# Altium PCB mchf_pro_ui.PcbDoc (part 6 of 6)
Units mm, origin at the board's own origin, x right, y up, seen from the top; angles counter-clockwise.
Board outline 200.09 x 143.79 mm, 2 copper layers (Top Layer, Bottom Layer); 329 components, 335 nets, 1276 pads, 515 vias.
Unrouted connection lines stored in the file: 91.
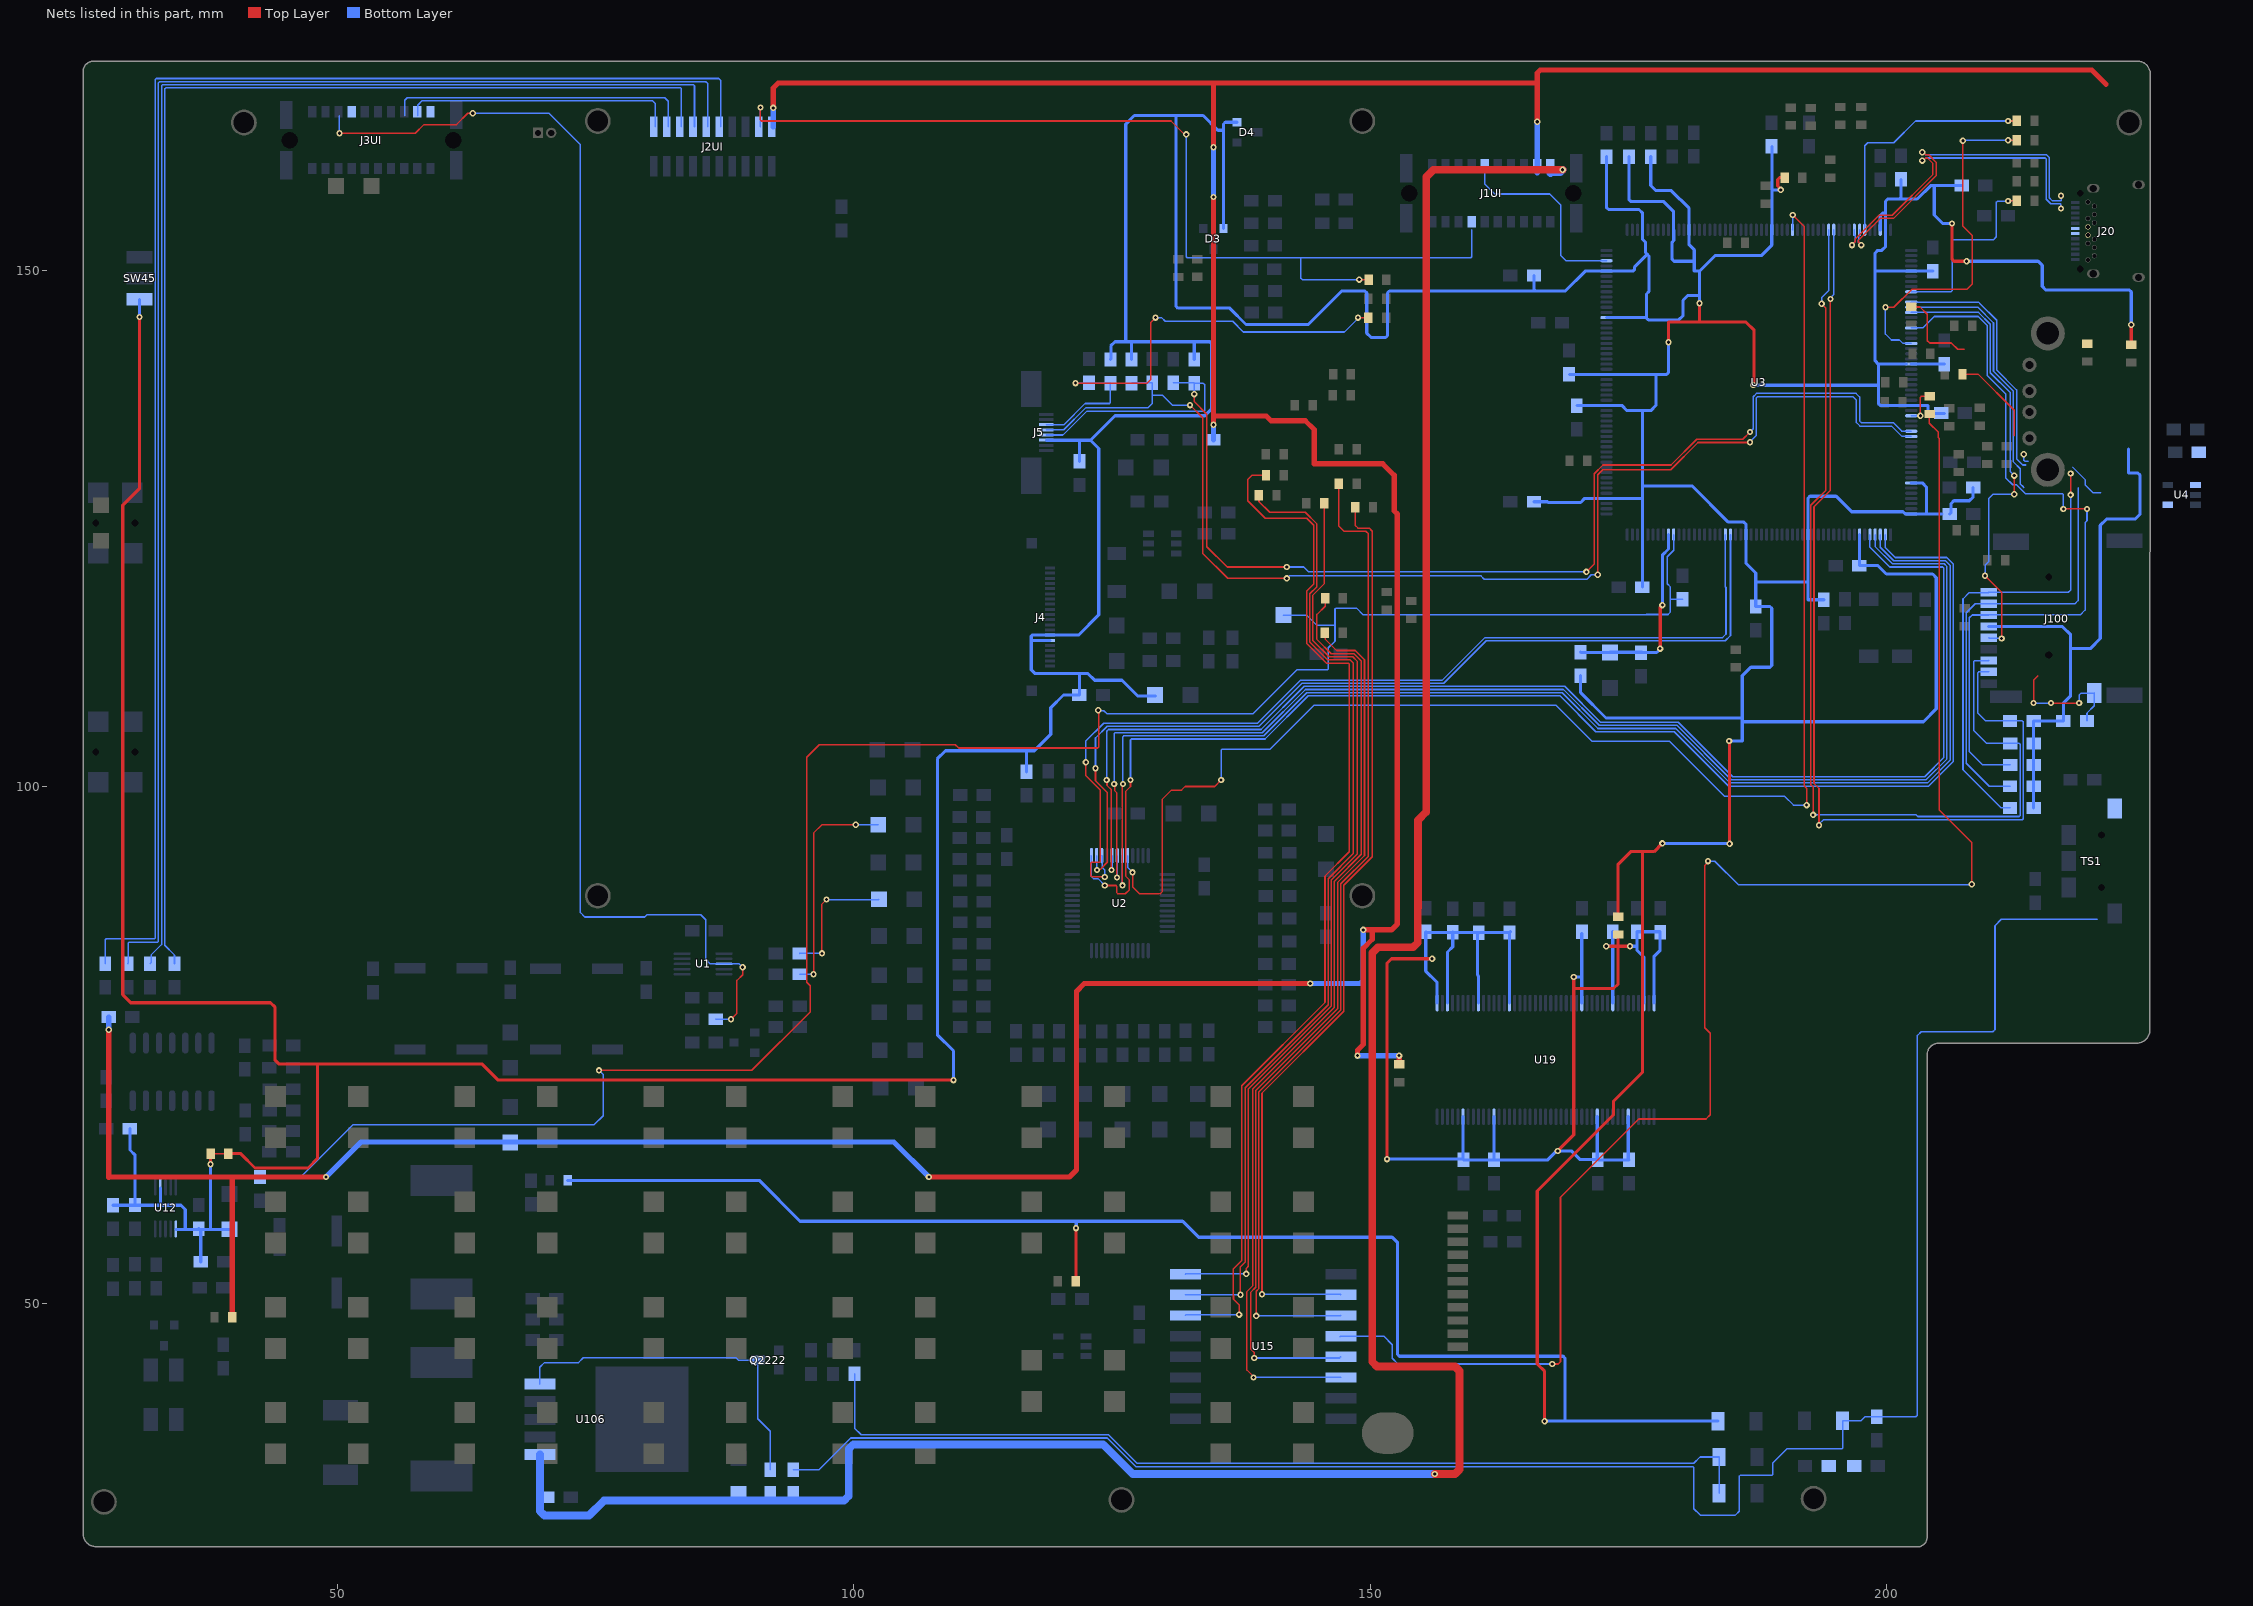
[diagram p5: the nets of this part, all layers, seen from the top]

## Via types
v1: diameter 0.61, hole 0.305, Top Layer to Bottom Layer, 511 vias
v2: diameter 0.762, hole 0.381, Top Layer to Bottom Layer, 4 vias

## Nets (pads, with @x,y where several pads share a name; then routed paths per layer and width w, separated by ;. In a path a pad name is that pad's centre, name@x,y a point inside that pad or via, vN(x,y) a via of type N, cw(c..) or ccw(c..) an arc to the next point about the centre after c; other vN are vias at no path point) (continued)
PTT: J1UI.A17 J2UI.A2 M70.1 | length 95.7
  Top Layer w0.152: v1(90.95,165.75) 90.95,164.539 91.039,164.45 130.7,164.45 132,163.15 v1(132.175,163.15) ; v1(148.916,149.092) M70.1@149.823,149.092
  Bottom Layer w0.152: J2UI.A2@90.92,163.88 90.95,163.91 v1(90.95,165.75) ; v1(132.175,163.15) 132.175,151.309 132.264,151.219 143.25,151.219 ; v1(148.916,149.092) 143.389,149.092 143.25,149.232 143.25,151.219 ; 159.792,153.916 159.792,151.309 159.703,151.219 143.25,151.219
RFM_DIO0: M69.1 U15.14 | length 101.1
  Top Layer w0.152: v1(137.288,48.901) 137.288,49.845 136.744,50.389 136.744,50.715 136.738,50.72 136.738,53.345 137.53,54.137 137.53,71.059 145.598,79.127 145.598,91.352 147.957,93.711 147.957,111.883 147.868,111.972 145.73,111.972 143.824,113.878 143.824,118.943 144.51,119.629 144.51,125.314 143.83,125.994 139.821,125.994 138.125,127.689 138.125,129.735 138.54,130.15 M69.1@139.884,130.15
  Bottom Layer w0.152: U15.14@132.088,48.825 132.164,48.901 v1(137.288,48.901)
RFM_DIO1: M68.1 U15.15 | length 94.9
  Top Layer w0.152: v1(137.411,50.822) 137.411,53.528 137.875,53.992 137.875,70.875 145.903,78.903 145.903,91.107 148.338,93.543 148.338,111.972 148.034,112.277 145.856,112.277 144.129,114.004 144.129,118.683 144.815,119.369 144.815,125.44 143.689,126.566 140.243,126.566 139.211,127.597 139.211,128.175 M68.1@139.186,128.2
  Bottom Layer w0.152: U15.15@132.088,50.825 132.091,50.822 v1(137.411,50.822)
RFM_DIO2: M62.1 U15.16 | length 88.5
  Top Layer w0.152: v1(137.979,52.851) 137.989,52.862 137.989,53.385 138.18,53.575 138.18,70.749 146.207,78.776 146.207,90.981 148.739,93.513 148.739,112.125 148.283,112.581 145.999,112.581 144.434,114.146 144.434,118.557 145.513,119.636 M62.1@145.513,127.425
  Bottom Layer w0.152: U15.16@132.088,52.825 132.114,52.851 v1(137.979,52.851)
RFM_MISO: M63.1 U15.2 | length 89.6
  Top Layer w0.152: v1(139.5,50.88) 139.504,50.884 139.504,70.349 147.427,78.271 147.427,90.476 150.178,93.228 150.178,124.737 149.874,125.042 148.789,125.042 148.535,125.296 M63.1@148.535,127.05
  Bottom Layer w0.152: v1(139.5,50.88) 147.07,50.88 U15.2@147.125,50.825
RFM_MOSI: M64.1 U15.3 | length 95.7
  Top Layer w0.152: v1(138.943,48.781) 138.943,51.174 139.199,51.43 139.199,70.475 147.122,78.398 147.122,90.602 149.805,93.286 149.805,124.483 149.551,124.737 147.449,124.737 146.941,125.245 M64.1@146.941,129.333
  Bottom Layer w0.152: v1(138.943,48.781) 147.081,48.781 U15.3@147.125,48.825
RFM_NSS: M67.1 U15.5 | length 86
  Top Layer w0.152: v1(138.747,44.709) 138.747,45.232 138.393,45.586 138.393,51.055 138.894,51.556 138.894,70.601 146.817,78.524 146.817,90.728 149.425,93.336 149.425,112.301 148.535,113.191 146.72,113.191 145.61,114.301 145.61,114.879 M67.1@145.585,114.904
  Bottom Layer w0.152: v1(138.747,44.709) 147.009,44.709 U15.5@147.125,44.825
RFM_RST: M60.1 U15.6 | length 92.1
  Top Layer w0.152: v1(138.671,42.823) 138.671,42.908 138.039,43.54 138.039,51.133 138.589,51.683 138.589,70.727 146.512,78.65 146.512,90.855 149.12,93.463 149.12,112.175 148.409,112.886 146.194,112.886 144.815,114.266 144.815,116.673 145.618,117.476 M60.1@145.618,118.25
  Bottom Layer w0.152: v1(138.671,42.823) U15.6@147.125,42.825 U15.6@147.125,42.825
RFM_SCK: M72.1 U15.4 | length 155.7
  Top Layer w0.152: v1(167.6,44.125) 168.18,44.125 168.395,44.339 168.395,60.277 175.96,67.842 182.488,67.842 182.903,68.256 182.903,76.13 182.349,76.684 182.349,92.37 182.673,92.694 v1(182.673,92.801) ; M72.1@204.098,136.089 204.098,135.198 204.955,134.341 204.955,133.822 205.044,133.734 205.044,97.771 208.205,94.609 v1(208.205,90.564)
  Bottom Layer w0.152: U15.4@147.05,46.75 U15.4@147.125,46.825 151.275,46.825 152.1,46 152.1,44.691 152.666,44.125 v1(167.6,44.125) ; v1(182.673,92.801) 183.339,92.801 185.63,90.509 208.15,90.509 v1(208.205,90.564)
RX_CLK_N: J2UI.A5 M37.1 | length 149.7
  Bottom Layer w0.152: M37.1@27.528,82.872 27.528,85.189 27.617,85.279 32.284,85.279 32.373,85.368 32.373,168.472 32.462,168.561 86.919,168.561 87.11,168.371 J2UI.A5@87.11,163.88
RX_CLK_P: J2UI.A6 M38.1 | length 145.6
  Bottom Layer w0.152: M38.1@29.696,82.872 29.739,82.915 29.739,84.86 29.828,84.95 32.588,84.95 32.678,85.039 32.678,168.142 32.792,168.256 85.659,168.256 85.84,168.076 J2UI.A6@85.84,163.88
RX_QSD_IN: J2UI.A10 J3UI.A20 | length 26.5
  Bottom Layer w0.152: 57.78,164.95 57.78,165.98 58.195,166.395 80.505,166.395 80.76,166.14 J2UI.A10@80.76,163.88
SAI1_FS_A: U2.43 U3.3 | length 131.2
  Top Layer w0.152: v1(125.992,90.454) 125.992,100.219 v1(126.037,100.264)
  Bottom Layer w0.152: v1(125.992,90.454) U2.43@125.992,93.343 ; v1(126.037,100.264) 126.037,104.845 126.126,104.934 139.668,104.934 143.843,109.109 168.554,109.109 172.021,105.642 179.541,105.642 184.809,100.373 203.912,100.373 206.109,102.57 206.109,119.397 206.109,121.439 205.663,121.885 200.661,121.885 199.349,123.198 U3.3@199.349,124.414
SAI1_FS_B: U2.39 U3.33 | length 93.9
  Top Layer w0.152: v1(122.45,102.375) 122.45,101.089 123.851,99.689 123.851,92.777 123.761,92.687 123.026,92.687 122.936,92.598 122.936,91.399 123.026,91.31 124.236,91.31 v1(124.281,91.265)
  Bottom Layer w0.152: v1(122.45,102.375) 122.45,104.428 124.176,106.153 139.074,106.153 143.249,110.328 156.966,110.328 161.083,114.445 184.076,114.445 184.416,114.785 184.416,119.307 184.349,119.374 U3.33@184.349,124.414 ; U2.39@123.992,93.343 124.027,93.308 124.027,92.191 124.281,91.937 v1(124.281,91.265)
SAI1_MCLK_A: U2.44 U3.137 | length 146.4
  Top Layer w0.152: v1(126.974,91.717) 126.974,90.324 127.649,89.649 129.649,89.649 129.825,89.825 129.825,98.768 130.74,99.683 131.716,99.683 132.057,100.024 134.92,100.024 v1(135.542,100.647) ; v1(190.883,155.355) 192,154.238 192,100.066 192.225,99.841 v1(192.225,98.225)
  Bottom Layer w0.152: U2.44@126.492,93.343 126.492,92.198 v1(126.974,91.717) ; v1(135.542,100.647) 135.542,103.563 135.632,103.653 140.299,103.653 144.536,107.89 167.957,107.89 171.425,104.422 178.933,104.422 184.271,99.084 190.082,99.084 190.941,98.225 v1(192.225,98.225) ; U3.137@190.849,153.914 190.866,153.931 190.866,155.339 v1(190.883,155.355)
SAI1_SCK_A: U2.42 U3.4 | length 130.6
  Top Layer w0.152: v1(125.184,100.276) 125.23,100.231 125.23,99.637 125.459,99.409 v1(125.459,91.216)
  Bottom Layer w0.152: v1(125.184,100.276) 125.184,105.149 125.273,105.239 139.537,105.239 143.712,109.414 168.68,109.414 172.147,105.946 179.667,105.946 184.935,100.678 203.785,100.678 205.804,102.697 205.804,119.523 205.804,121.313 205.536,121.581 200.535,121.581 198.849,123.267 U3.4@198.849,124.414 ; v1(125.459,91.216) 125.492,91.249 U2.42@125.492,93.343
SAI1_SCK_B: U2.38 U3.32 | length 90.6
  Top Layer w0.152: v1(123.381,101.8) 123.381,100.589 124.526,99.445 124.526,92.687 123.865,92.026 123.613,92.026 v1(123.525,91.938)
  Bottom Layer w0.152: v1(123.381,101.8) 123.381,104.718 124.511,105.848 139.2,105.848 143.375,110.023 157.092,110.023 161.209,114.14 184.349,114.14 184.849,114.64 U3.32@184.849,124.414 ; U2.38@123.492,93.343 123.492,91.972 v1(123.525,91.938)
SAI1_SD_A: U2.41 U3.5 | length 129.8
  Top Layer w0.152: v1(124.462,100.664) 124.496,100.629 124.496,100.131 124.925,99.702 v1(124.925,91.938)
  Bottom Layer w0.152: v1(124.462,100.664) 124.462,105.368 124.637,105.544 139.41,105.544 143.585,109.719 168.806,109.719 172.273,106.251 179.793,106.251 185.062,100.983 203.659,100.983 205.499,102.823 205.499,119.65 205.499,121.187 205.41,121.276 200.266,121.276 198.349,123.192 U3.5@198.349,124.414 ; v1(124.925,91.938) 124.992,92.005 U2.41@124.992,93.343
SAI1_SD_B: U2.37 U3.2 | length 135.5
  Top Layer w0.152: v1(124.281,90.447) 125.369,90.447 125.459,90.357 125.459,89.728 125.548,89.639 126.267,89.639 126.669,90.04 126.669,90.98 126.297,91.352 126.297,99.547 126.774,100.024 v1(126.774,100.651)
  Bottom Layer w0.152: U2.37@122.992,93.343 122.961,93.312 122.961,91.329 123.178,91.111 123.617,91.111 v1(124.281,90.447) ; v1(126.774,100.651) 126.774,104.533 126.863,104.623 139.788,104.623 143.969,108.804 168.352,108.804 171.819,105.337 179.402,105.337 184.689,100.05 204.02,100.05 206.414,102.444 206.414,119.271 206.414,121.565 205.789,122.19 200.788,122.19 199.849,123.129 U3.2@199.849,124.414
SD_DET: J100.10 M85.1 R39.2 | length 20.8
  Top Layer w0.152: M85.1@202.354,146.466 202.38,146.44 203.19,146.44 203.9,145.731 203.9,143.187 204.132,142.955 206.23,142.955 206.842,142.343 207.464,142.343 ; v1(214.191,108.1) 214.191,110.317 214.595,110.721 ; v1(215.875,108.1) v1(218.6,108.1)
  Bottom Layer w0.152: v1(214.191,108.1) v1(215.875,108.1) ; v1(218.6,108.1) 218.6,108.889 218.783,109.072 220.047,109.072 J100.10@220.05,109.075 ; R39.2@219.361,106.375 219.361,107.132 220.061,107.832 J100.10@220.061,109.072
SD_POWER: C43.1 J100.4 R36.1 R37.1 R38.1 R39.1 R40.1 R41.1 U4.1 | length 54
  Bottom Layer w0.305: J100.4@209.85,115.525 209.857,115.518 216.982,115.518 217.775,114.725 217.775,113.37 ; R36.1@214.191,97.95 214.191,98.606 R41.1@214.191,100.048 214.191,102.119 214.191,104.2 R37.1@214.191,106.375 R39.1@217.075,106.375 217.075,108.1 217.775,108.8 217.775,113.37 ; 223.385,132.675 223.385,130.364 224.296,130.364 224.475,130.186 224.475,126.353 224.037,125.914 221.263,125.914 220.65,125.302 220.65,114.35 219.67,113.37 217.775,113.37
SD_PWR_CNTR: M3.1 U4.4 | length 13.9
  Top Layer w0.152: M3.1@207.305,139.948 208.814,139.948 212.325,136.437 212.325,133.982
  Bottom Layer w0.152: v1(213.239,132.185) 213.236,132.181 213.236,131.613 213.325,131.524 213.651,131.524 ; 218,130.914 219.175,129.739 219.175,129.236 219.946,128.464 220.685,128.464
SDMMC1_CK: J100.5 U3.169 | length 43.8
  Top Layer w0.152: v1(209.495,120.425) 211.094,118.826 v1(211.094,114.362) ; v1(212.325,128.315) v1(212.325,130.119)
  Bottom Layer w0.152: U3.169@202.349,145.914 208.867,145.914 210.006,144.775 210.006,140.088 211.935,138.159 211.935,130.508 v1(212.325,130.119) ; v1(209.495,120.425) 209.495,121.449 209.85,121.804 209.85,127.907 210.258,128.315 v1(212.325,128.315) ; J100.5@209.85,114.425 209.913,114.362 v1(211.094,114.362)
SDMMC1_CMD: J100.3 R40.2 U3.172 | length 72.4
  Top Layer w0.152: v1@217.083,126.906 v1(217.075,126.898) v1(219.361,126.898)
  Bottom Layer w0.152: U3.172@202.349,144.414 203.47,144.414 204.577,145.522 208.828,145.522 209.701,144.649 209.701,139.814 211.5,138.015 211.5,129.898 212.162,129.236 212.545,129.236 213.432,128.349 216.986,128.349 217.075,128.26 v1(217.075,126.898) ; R40.2@211.938,102.119 209.264,102.119 207.967,103.416 207.967,116.351 208.245,116.629 209.846,116.629 J100.3@209.85,116.625 209.862,116.637 218.7,116.637 219.175,117.112 219.175,125.565 219.361,125.751 v1(219.361,126.898)
SDMMC1_D0: J100.7 R38.2 U3.144 | length 98
  Top Layer w0.152: v1(192.848,97.28) 192.848,99.978 192.631,100.195 192.631,127.24 194.08,128.69 194.08,146.355 v1(193.672,146.764)
  Bottom Layer w0.152: v1(192.848,97.28) 202.806,97.28 202.965,97.121 212.799,97.121 212.888,97.21 212.888,104.111 212.799,104.2 R38.2@211.938,104.2 209.65,104.2 208.417,105.433 208.417,112.126 208.506,112.215 209.84,112.215 J100.7@209.85,112.225 ; v1(193.672,146.764) 193.672,147.348 194.349,148.026 U3.144@194.349,153.914
SDMMC1_D1: J100.8 R37.2 U3.145 | length 97.8
  Top Layer w0.152: v1(193.418,96.283) 193.418,99.839 192.936,100.321 192.936,127.114 194.523,128.701 v1(194.523,147.222)
  Bottom Layer w0.152: v1(193.418,96.283) 193.418,96.386 193.848,96.816 213.103,96.816 213.193,96.906 213.193,106.283 213.101,106.375 R37.2@211.905,106.375 209.55,106.375 208.8,107.125 208.8,111.04 208.889,111.129 209.846,111.129 J100.8@209.85,111.125 ; v1(194.523,147.222) 194.523,147.323 194.849,147.65 U3.145@194.849,153.914
SDMMC1_D2: J100.1 R36.2 U3.167 | length 68.8
  Top Layer w0.152: v1(217.775,128.26) v1@217.775,130.119
  Bottom Layer w0.152: U3.167@202.349,146.914 208.849,146.914 209,146.764 ; 209.001,146.764 210.616,145.149 210.616,140.34 212.545,138.411 212.545,131.751 213.146,131.15 213.432,131.15 ; 209.902,99.1 211.052,97.95 R36.2@211.905,97.95 ; 209.902,99.1 207.358,101.644 207.358,118.183 207.973,118.798 209.823,118.798 209.858,118.833 217.557,118.833 217.775,119.051 v1(217.775,128.26)
  other v1: 217.775,130.321
SDMMC1_D3: J100.2 R41.2 U3.168 | length 67.7
  Bottom Layer w0.152: U3.168@202.349,146.414 208.798,146.414 210.311,144.902 210.311,140.214 212.24,138.285 212.24,131.446 212.9,130.786 212.9,129.312 213.181,129.031 213.256,128.956 ; J100.2@209.85,117.725 209.842,117.717 208.537,117.717 207.662,116.843 207.662,102.288 209.902,100.048 R41.2@211.905,100.048 ; J100.2@209.85,117.725 218.201,117.724 218.5,118.023 218.5,128.555 218.5,128.956
SPA_L: C8.2 R1.2 | length 12.7
  Top Layer w0.152: v1(96.9,83.875) 96.9,88.642 v1(97.34,89.082)
  Bottom Layer w0.152: R1.2@94.736,83.85 94.761,83.875 v1(96.9,83.875) ; v1(97.34,89.082) 102.386,89.082 C8.2@102.42,89.117
SPA_R: C9.2 R2.2 | length 21.6
  Top Layer w0.152: v1(96.095,81.85) 96.095,95.525 96.9,96.33 v1(100.182,96.33)
  Bottom Layer w0.152: R2.2@94.736,81.85 v1(96.095,81.85) ; v1(100.182,96.33) C9.2@102.345,96.33
SPK_RET: J3UI.A14 R3.2 U1.3 | length 128.7
  Top Layer w0.152: v1(50.199,163.258) 57.544,163.258 58.388,164.102 61.527,164.102 62.625,165.2 v1(63.1,165.2) ; v1(88.1,77.5) 88.673,78.073 88.673,81.253 89.225,81.805 v1(89.225,82.525)
  Bottom Layer w0.152: 50.16,164.95 50.16,163.297 v1(50.199,163.258) ; v1(63.1,165.2) 70.484,165.2 73.526,162.158 73.526,149.575 73.526,87.825 73.955,87.396 79.759,87.396 79.975,87.612 85.175,87.612 85.655,87.132 85.655,83.295 86.1,82.85 U1.3@87.425,82.85 88.893,82.85 89.218,82.525 v1(89.225,82.525) ; R3.2@86.625,77.5 v1(88.1,77.5)
SWCLK: M1c.2 U3.165 | length 18.7
  Top Layer w0.152: v1(211.725,156.707) M1c.2@212.563,156.707
  Bottom Layer w0.152: U3.165@202.349,147.914 206.188,147.914 206.3,148.026 206.3,152.87 206.389,152.96 210.311,152.96 210.585,153.234 210.585,156.576 210.674,156.666 211.683,156.666 v1(211.725,156.707)
SWDIO: M1b.2 U3.151 | length 23.8
  Top Layer w0.152: v1(211.725,164.45) M1b.2@212.563,164.45
  Bottom Layer w0.152: U3.151@197.849,153.914 197.849,162.061 198.125,162.337 200.651,162.337 202.764,164.45 v1(211.725,164.45)
SWO: M72.2 U3.189 | length 3.6
  Top Layer w0.152: v1(203.233,135.914) 203.233,137.714 203.322,137.803 M72.2@204.153,137.803
  Bottom Layer w0.152: U3.189@202.349,135.914 v1(203.233,135.914)
TOUCH_INT: C62.1 J5.6 M5.1 R55.2 | length 47.8
  Top Layer w0.152: v1(121.445,139.07) 128.378,139.07 128.75,139.442 128.75,144.964 v1(129.2,145.414) ; v1(148.789,145.414) M5.1@149.797,145.414
  Bottom Layer w0.152: J5.6@118.628,135.05 120.328,135.05 122.378,137.1 124.736,137.1 124.825,137.189 R55.2@124.825,139.075 122.8,139.075 C62.1@122.75,139.125 122.695,139.07 v1(121.445,139.07) ; v1(129.2,145.414) 129.784,145.414 130.141,145.057 136.663,145.057 137.697,144.024 147.481,144.024 148.789,145.332 v1(148.789,145.414)
TOUCH_SCK: C63.2 J5.4 R53.2 U3.192 | length 124.4
  Top Layer w0.152: v1(132.941,138.008) 132.941,137.283 134.16,136.064 134.16,123.24 136.125,121.275 v1(141.9,121.275) ; v1(170.9,120.8) 171.663,121.563 171.663,130.31 172.503,131.15 179.097,131.15 181.577,133.63 186.029,133.63 v1(186.747,134.348)
  Bottom Layer w0.152: J5.4@118.628,134.05 120.232,134.05 122.552,136.37 133.867,136.37 133.956,136.459 133.956,138.914 133.795,139.075 R53.2@132.936,139.075 ; C63.2@130.9,139.092 132.919,139.092 R53.2@132.936,139.075 ; v1(132.941,138.008) 132.941,139.07 R53.2@132.936,139.075 ; v1(141.9,121.275) 143.543,121.275 144.018,120.8 v1(170.9,120.8) ; v1(186.747,134.348) 187.044,134.645 187.044,137.751 187.368,138.075 197.009,138.075 197.349,137.735 197.349,135.414 197.513,135.25 200.597,135.25 201.348,134.5 201.433,134.414 U3.192@202.349,134.414
TOUCH_SDA: C61.2 J5.5 R54.2 U3.193 | length 122.1
  Top Layer w0.152: v1(132.525,136.945) 133.758,135.712 133.758,122.592 136.175,120.175 v1(141.9,120.175) ; v1(171.996,120.526) 171.996,130.212 172.483,130.699 179.078,130.699 181.703,133.325 186.718,133.325 v1(186.747,133.354)
  Bottom Layer w0.152: J5.5@118.628,134.55 120.301,134.55 122.426,136.675 128.45,136.675 128.875,137.1 128.875,137.914 ; R54.2@126.872,139.075 126.922,139.125 C61.2@128.875,139.125 128.875,137.914 ; v1(132.525,136.945) 130.811,136.945 129.842,137.914 128.875,137.914 ; v1(141.9,120.175) 142.133,120.408 160.707,120.408 161.016,120.099 170.953,120.099 171.38,120.526 v1(171.996,120.526) ; v1(186.747,133.354) 186.747,133.406 187.349,134.008 187.349,137.625 187.494,137.77 196.685,137.77 197.044,137.411 197.044,135.25 197.38,134.914 200.444,134.914 201.444,133.914 U3.193@202.349,133.914
TX_CLK_N: J2UI.A8 M40.1 | length 138.8
  Bottom Layer w0.152: M40.1@34.234,82.872 34.23,82.876 34.23,83.71 33.29,84.65 33.29,167.558 33.379,167.647 83.211,167.647 83.3,167.558 J2UI.A8@83.3,163.88
TX_CLK_P: J2UI.A7 M39.1 | length 141.1
  Bottom Layer w0.152: M39.1@31.863,82.872 31.967,82.975 31.967,83.71 32.983,84.726 32.983,167.862 33.072,167.952 84.481,167.952 84.57,167.862 J2UI.A7@84.57,163.88
TX_MIX: J2UI.A9 J3UI.A19 | length 29.7
  Bottom Layer w0.152: 56.51,164.95 56.51,166.45 56.76,166.7 81.691,166.7 82.03,166.361 J2UI.A9@82.03,163.88
UI_3V_LO: C65.1 C66.1 M34.2 M36.2 R59.2 R60.2 RFC6.2 U12.1 U12.7 | length 33.9
  Top Layer w0.305: v1(37.724,63.464) M34.2@37.724,64.485
  Bottom Layer w0.305: R60.2@28.292,59.491 30.418,59.491 32.861,59.491 34.864,59.491 35.273,59.082 35.273,57.217 35.214,57.158 ; M36.2@29.914,66.892 29.918,66.889 29.918,64.835 30.418,64.335 R59.2@30.418,59.518 ; 32.861,59.55 U12.7@32.861,61.156 ; U12.1@34.388,57.158 35.214,57.158 ; RFC6.2@36.774,54.014 C65.1@36.774,57.031 ; v1(37.724,63.464) 37.724,57.158 ; C66.1@39.55,57.158 37.724,57.158 ; 35.214,57.158 36.578,57.158 C65.1@36.578,57.227 36.647,57.158 36.774,57.158 37.724,57.158
UI_3V_MCU: C59.2 C60.1 C64.2 Cp7.1 Cp17.1 Cp29.1 Cp49.1 Cp56.1 Cp74.1 Cp80.1 Cp100.1 Cp108.1 Cp114.1 Cp117.1 Cp133.1 Cp155.1 Cp161.1 Cp179.1 Cp187.1 Cp208.1 D3.2 D4.2 D17.1 J4.6 J4.7 J5.3 M1.2 M22.1 M25.1 M34.1 M42.1 M43.1 M120.2 R32.1 R33.1 R53.1 R54.1 R55.1 RFC3.1 SW45.3 U3.7 U3.17 U3.29 U3.49 U3.56 U3.74 U3.80 U3.91 U3.100 U3.108 U3.114 U3.117 U3.133 U3.154 U3.155 U3.161 U3.179 U3.187 U3.202 U3.208 | length 1042.9
  Top Layer w0.305: v1(30.85,145.475) 30.85,128.885 29.219,127.254 29.219,79.881 30,79.1 43.525,79.1 43.975,78.65 43.975,73.525 44.325,73.175 47.975,73.175 ; M34.1@39.439,64.485 40.64,64.485 42.025,63.1 47.15,63.1 48.075,64.025 48.075,73.075 47.975,73.175 ; v1(109.643,71.601) 65.553,71.601 63.979,73.175 47.975,73.175 ; M42.1@121.457,52.125 121.5,52.168 v1(121.5,57.275) ; v1(166.862,38.582) 166.862,43.409 166.15,44.12 166.15,60.875 173.53,68.255 173.53,69.565 176.327,72.362 176.327,93.725 ; M43.1@173.974,87.41 173.974,92.503 175.196,93.725 176.327,93.725 ; v1(178.257,94.524) 177.458,93.725 176.327,93.725 ; v1(178.849,143.035) 178.849,144.975 181.849,144.975 ; v1(181.849,146.806) 181.849,144.975 ; v1(184.72,104.422) 184.769,104.373 v1(184.769,94.491) ; v1@187.135,139.168 187.135,144.19 186.351,144.975 181.849,144.975 ; v1(189.711,157.783) 189.711,157.866 189.421,158.156 189.421,158.786 189.6,158.965 M22.1@190.095,158.965 ; v1(206.3,154.524) 206.3,151.051 206.478,150.873 v1(207.706,150.873) ; M25.1@223.62,142.782 223.65,142.812 v1(223.65,144.731)
  Bottom Layer w0.305: v1(30.85,145.475) SW45.3@30.85,147.175 ; M120.2@72.282,61.898 90.832,61.898 94.78,57.95 121.525,57.95 ; v1(109.643,71.601) 109.643,74.432 108.075,76 108.075,102.696 108.869,103.49 116.882,103.49 ; M1.2@116.704,101.45 116.704,103.312 116.882,103.49 ; J5.3@118.628,133.55 121.825,133.55 ; J4.6@118.975,114.175 117.24,114.175 117.165,114.1 ; v1(121.5,57.275) 121.525,57.3 121.525,57.95 ; C64.2@121.825,131.5 121.825,133.55 ; R55.1@124.825,141.361 124.875,141.411 124.875,142.675 125.275,143.075 126.307,143.075 ; R54.1@126.872,141.361 126.872,143.025 126.922,143.075 ; C60.1@129.161,108.788 127.45,108.788 127.45,108.817 125.952,110.315 123.297,110.315 122.661,110.95 121.825,110.95 ; R53.1@132.936,141.361 132.936,143.07 132.941,143.075 ; D3.2@135.78,154.034 135.78,163.55 ; D4.2@137.075,164.33 135.959,164.33 135.78,164.151 135.78,163.55 ; Cp56.1@165.828,127.584 167.136,127.584 167.199,127.522 170.343,127.522 170.736,127.914 176.349,127.914 ; Cp100.1@165.828,149.487 165.828,148.164 166.007,147.985 ; v1(166.862,38.582) 166.88,38.6 168.827,38.6 ; Cp80.1@169.259,139.914 177.635,139.914 ; Cp74.1@169.984,136.914 174.332,136.914 174.832,136.414 176.259,136.414 ; RFC3.1@170.343,110.743 170.343,109.11 172.8,106.653 185.991,106.653 ; U3.91@172.849,145.414 176.679,145.414 176.723,145.37 ; Cp108.1@172.849,160.99 172.858,160.981 172.858,156.054 173.036,155.875 175.989,155.875 176.349,155.515 U3.108@176.349,153.914 176.349,152.978 176.622,152.705 176.622,151.708 176.787,151.543 ; Cp114.1@175.019,160.99 175.019,156.844 175.198,156.666 178.343,156.666 179.349,155.659 U3.114@179.349,153.914 179.352,153.912 179.352,152.874 179.202,152.725 179.202,151.055 179.38,150.876 181.349,150.876 ; Cp49.1@176.349,119.335 176.349,127.914 ; Cp117.1@177.135,160.99 177.135,158.209 177.635,157.709 179.129,157.709 180.849,155.989 U3.117@180.849,153.914 180.849,152.471 181.349,151.971 181.349,150.876 ; v1(178.257,94.524) 178.274,94.507 184.753,94.507 v1(184.769,94.491) ; v1@178.849,142.914 178.849,140.093 178.671,139.914 177.635,139.914 ; v1(181.849,146.806) 181.849,147.568 ; D17.1@183.65,38.6 168.827,38.6 ; v1(184.72,104.422) 185.991,104.422 185.991,106.293 ; v1@187.066,138.863 199.171,138.863 ; 188.859,159.446 188.859,157.783 ; 188.864,159.506 Cp133.1@188.864,161.98 ; v1(189.711,157.783) 188.859,157.783 ; Cp17.1@193.873,118.108 192.349,118.108 192.349,119.836 ; U3.7@197.349,124.414 197.349,121.425 Cp7.1@197.327,121.403 199.133,121.403 199.939,120.597 204.419,120.597 204.775,120.241 204.775,107.537 203.532,106.293 185.991,106.293 ; U3.154@199.349,153.914 199.349,155.275 199.589,155.515 199.849,155.515 ; Cp155.1@201.362,158.793 201.362,157.07 201.183,156.891 ; U3.179@201.902,140.912 199.171,140.912 ; U3.202@202.349,129.414 203.416,129.414 203.823,129.007 203.823,126.414 ; U3.179@202.349,140.914 Cp179.1@205.536,140.914 ; Cp161.1@204.422,149.917 202.351,149.917 U3.161@202.349,149.914 202.345,149.918 198.857,149.918 198.853,149.914 ; 205.298,126.414 203.823,126.414 ; Cp187.1@205.536,136.128 204.241,136.128 203.955,136.414 203.955,136.914 199.349,136.914 199.171,137.093 199.171,138.863 ; Cp208.1@206.071,126.409 206.21,126.549 206.21,127.42 206.471,127.68 207.963,127.68 208.335,128.052 R33.1@208.335,128.956 ; v1(206.3,154.524) 205.398,154.524 204.577,155.345 204.577,158.195 ; R32.1@207.223,158.195 204.577,158.195 ; v1(207.706,150.873) 214.627,150.873 215.025,150.475 215.025,148.45 215.396,148.079 223.471,148.079 223.65,147.9 v1(223.65,144.731) ; 116.882,103.49 117.453,103.49 119.049,105.087 119.049,107.651 120.285,108.887 C59.2@121.825,108.887 121.825,110.95 ; 117.165,114.1 117.165,114.586 117.254,114.675 J4.7@118.975,114.675 121.732,114.675 123.705,116.647 123.705,132.745 122.9,133.55 ; 117.165,114.1 117.165,111.335 117.55,110.95 121.825,110.95 ; 121.525,57.95 131.813,57.95 133.363,56.4 152.1,56.4 152.625,55.875 152.625,45.048 152.804,44.869 168.648,44.869 168.827,44.691 168.827,38.6 ; 121.825,133.55 122.9,133.55 ; 122.9,133.55 125.271,135.921 133.956,135.921 134.625,136.59 134.625,142.896 134.446,143.075 132.941,143.075 ; 126.307,143.075 126.307,164.132 127.15,164.975 131.125,164.975 ; 126.307,143.075 126.922,143.075 ; 126.922,143.075 132.941,143.075 ; 131.125,164.975 133.801,164.975 135.226,163.55 135.78,163.55 ; 131.125,164.975 131.175,164.925 131.175,146.515 131.354,146.336 136.374,146.336 137.957,144.753 143.993,144.753 147.225,147.985 149.456,147.985 149.635,147.807 149.635,143.914 150.061,143.488 151.471,143.488 151.65,143.666 151.65,147.807 151.829,147.985 166.007,147.985 ; 166.007,147.985 168.85,147.985 170.78,149.914 U3.100@172.849,149.914 175.394,149.915 175.573,150.093 175.573,150.329 176.787,151.543 ; 176.259,136.414 176.349,136.324 176.349,129.114 ; 176.259,136.414 177.135,136.414 177.635,136.914 177.635,139.914 ; 176.349,127.914 176.349,129.114 ; 176.349,129.114 181.15,129.114 184.641,125.623 186.144,125.623 186.349,125.418 U3.29@186.349,124.414 186.351,124.413 186.351,121.639 187.298,120.692 187.298,119.736 ; 176.723,145.37 176.902,145.192 179.849,145.192 180.254,145.596 180.254,147.084 180.738,147.568 181.849,147.568 ; 176.723,145.37 176.723,147.701 176.951,147.929 176.951,151.378 176.787,151.543 ; 181.349,150.876 181.349,149.914 181.849,149.914 ; 181.849,147.568 181.849,149.914 ; 181.849,149.914 183.349,151.415 187.835,151.415 188.849,152.429 U3.133@188.849,153.914 188.849,154.36 188.859,154.369 188.859,157.783 ; 185.991,106.293 185.991,106.653 ; 185.991,106.653 185.991,110.743 186.824,111.577 188.671,111.577 188.849,111.755 188.849,117.274 188.671,117.452 Cp29.1@187.292,117.452 187.292,119.197 187.298,119.203 187.298,119.736 ; 187.298,119.736 187.398,119.836 192.349,119.836 ; 192.349,119.836 192.349,127.938 192.537,128.125 195.074,128.125 196.582,126.617 201.553,126.617 201.756,126.414 U3.208@202.349,126.414 203.823,126.414 ; 198.853,149.914 198.853,151.674 199.102,151.923 199.51,151.923 199.849,152.262 199.849,155.515 ; 198.853,149.914 198.853,141.23 199.171,140.912 ; 199.171,138.863 199.171,140.912 ; 199.849,155.515 199.849,156.666 200.075,156.891 201.183,156.891 ; 201.183,156.891 202.915,156.891 204.219,158.195 204.577,158.195
  other v1: 187.066,138.883
UI_3V_SDRAM: Cr1.1 Cr3.1 Cr9.1 Cr15.1 Cr29.1 Cr35.1 Cr41.1 Cr43.1 Cr49.1 Cr55.1 Cr75.1 Cr81.1 M43.2 U19.1 U19.3 U19.9 U19.15 U19.29 U19.35 U19.41 U19.43 U19.49 U19.55 U19.75 U19.81 | length 162.8
  Top Layer w0.305: v1(151.602,63.957) 151.602,82.924 152.03,83.353 v1(155.969,83.353) ; v1(168.127,64.75) 168.127,64.771 169.674,66.318 169.674,80.525 ; v1(169.674,81.584) 169.674,80.525 ; v1(172.818,84.57) 172.82,84.568 173.974,84.568 ; M43.2@173.974,85.696 173.974,84.568 ; v1(175.129,84.568) 173.974,84.568 ; 169.674,80.525 169.729,80.47 173.53,80.47 173.974,80.914 173.974,84.568
  Bottom Layer w0.305: v1(151.602,63.957) 158.949,63.957 Cr81.1@159.02,63.887 158.956,63.95 U19.81@158.956,68.06 ; v1(155.969,83.353) 155.354,83.353 ; U19.1@156.456,79.06 156.456,81.053 155.354,82.155 155.354,83.353 ; U19.3@157.456,79.06 157.456,84.005 157.962,84.511 Cr3.1@157.962,85.894 ; Cr3.1@157.962,85.915 Cr3.1@157.962,85.894 ; Cr81.1@159.025,63.887 Cr75.1@161.951,63.887 167.154,63.887 168.017,64.75 v1(168.127,64.75) 169.451,64.75 170.292,63.909 Cr55.1@172.012,63.909 ; U19.9@160.456,79.06 160.456,81.69 160.376,81.77 160.376,85.757 Cr9.1@160.49,85.872 ; Cr75.1@161.956,63.909 U19.75@161.956,68.06 ; U19.15@163.456,79.06 163.456,85.888 Cr15.1@163.462,85.894 ; Cr15.1@163.542,85.973 Cr15.1@163.462,85.894 ; v1(169.674,81.584) 170.342,81.584 170.456,81.469 ; U19.29@170.456,79.06 170.456,81.469 ; Cr29.1@170.456,85.81 170.456,81.469 ; U19.55@171.956,68.06 171.956,63.964 Cr55.1@172.012,63.909 ; v1(172.818,84.57) 173.456,84.57 ; U19.35@173.456,79.06 173.456,84.57 ; Cr35.1@173.456,85.973 173.456,84.57 ; Cr49.1@174.956,63.952 U19.49@174.956,68.06 ; Cr49.1@175.021,63.887 172.034,63.887 Cr55.1@172.012,63.909 ; v1(175.129,84.568) 175.799,84.568 175.801,84.57 ; U19.41@176.456,79.06 176.456,83.525 175.801,84.18 175.801,84.57 ; U19.43@177.456,79.06 177.456,83.6 178.036,84.18 178.036,85.973 Cr41.1@175.807,85.973 175.801,85.973 175.801,84.57 ; 155.354,83.353 Cr1.1@155.354,85.952 155.412,85.894 Cr3.1@157.962,85.894 ; Cr3.1@157.962,85.894 Cr15.1@163.462,85.894
USART2_TX: M1a.2 U3.175 | length 34.3
  Top Layer w0.152: v1(199.849,146.414) 200.656,146.414 202.412,148.17 207.754,148.17 208.239,148.655 208.239,153.398 207.345,154.292 v1(207.345,162.541) ; v1(211.725,162.58) M1a.2@212.563,162.58
  Bottom Layer w0.152: v1(199.849,146.414) 199.849,143.831 200.43,143.25 201.202,143.25 201.538,142.914 U3.175@202.349,142.914 ; v1(207.345,162.541) 207.384,162.58 v1(211.725,162.58)
USB_DFU_N: J20.A7 J20.B7 U3.149 | length 33
  Top Layer w0.152: v1(196.614,152.431) 196.614,152.451 196.911,152.749 196.911,153.012 199.219,155.32 200.501,155.32 204.446,159.265 204.446,160.336 203.917,160.866 203.735,160.866 203.481,160.611 v1(203.417,160.611)
  Bottom Layer w0.152: v1(196.614,152.431) 196.614,152.451 196.911,152.749 196.911,153.051 196.947,153.086 196.947,153.327 196.849,153.424 U3.149@196.849,153.914 ; v1(203.417,160.611) 203.481,160.611 203.735,160.866 215.321,160.866 215.411,160.776 215.411,156.882 215.85,156.443 216.814,156.443 216.814,155.993 v1(216.838,155.969)
USB_DFU_P: J20.A6 J20.B6 U3.150 | length 33.6
  Top Layer w0.152: v1(197.513,152.429) 197.513,152.449 197.216,152.747 197.216,152.886 199.345,155.015 200.627,155.015 204.751,159.138 204.751,160.463 204.043,161.17 203.735,161.17 203.481,161.425 v1(203.417,161.425)
  Bottom Layer w0.152: U3.150@197.349,153.914 197.349,153.424 197.252,153.327 197.252,152.96 197.216,152.924 197.216,152.747 197.513,152.449 v1(197.513,152.429) ; v1(203.417,161.425) 203.481,161.425 203.735,161.17 215.448,161.17 215.716,160.902 215.716,157.008 215.976,156.748 216.877,156.748 216.877,157.188 v1(216.85,157.215)
VBAT: C32a.1 C48.1 D18.1 R32a.2 R32b.1 TS1.e | length 188.4
  Bottom Layer w0.152: R32a.2@94.133,33.905 94.152,33.886 96.62,33.886 99.694,36.96 124.525,36.96 127.297,34.188 181.215,34.188 181.304,34.098 181.304,30.121 181.925,29.5 185.325,29.5 185.692,29.867 185.692,33.253 185.781,33.342 188.861,33.342 188.95,33.431 188.95,34.55 190.308,35.908 195.611,35.908 195.7,35.997 D18.1@195.7,38.625 197.475,38.625 197.861,39.011 C48.1@199,39.011 202.786,39.011 202.947,39.173 202.947,75.925 203.304,76.282 210.233,76.282 210.452,76.501 210.452,86.552 211.065,87.165 220.365,87.165
VCC_3V_ON: D120.2 D123.2 R222.1 | length 94.1
  Bottom Layer w0.152: R222.1@100.064,43.176 100.064,37.918 100.702,37.279 124.637,37.279 127.405,34.511 181.295,34.511 181.909,35.125 D123.2@183.742,35.125 D120.2@183.742,31.625
VCC_3V_ON_DIRTY: Q2222.3 R444.1 U106.5 | length 34.3
  Bottom Layer w0.152: U106.5@69.6,42.183 69.6,43.819 70.046,44.266 73.341,44.266 73.8,44.725 88.595,44.725 88.831,44.49 Q2222.3@90.693,44.49 90.693,38.832 91.9,37.625 R444.1@91.9,33.886
VCC_5V_ON: J1UI.A6 U3.102 | length 18.8
  Bottom Layer w0.152: 161.062,159.416 161.062,158.358 162.037,157.383 167.344,157.383 168.436,156.291 168.436,151.405 168.927,150.914 U3.102@172.849,150.914
VCC_5V_RF: J1UI.A2 J2UI.A1 M34a.2 M35.2 M101s.1 M121.1 R10.1 RFC4.1 | length 440.4
  Top Layer w0.508: v1(27.865,76.475) 27.865,62.175 27.915,62.225 39.814,62.225 ; M34a.2@39.814,48.643 39.814,62.225 ; v1(48.9,62.225) 39.814,62.225 ; v1(92.19,165.715) 92.19,167.64 92.675,168.125 134.8,168.125 ; v1(107.25,62.225) 120.875,62.225 121.55,62.9 121.55,80.2 122.3,80.95 v1(144.175,80.95) ; v1(134.8,135.05) 134.8,135.9 ; v1@134.8,156.975 134.8,135.9 ; v1(134.8,161.9) 134.8,168.125 ; v1(148.739,73.975) 148.739,74.501 149.3,75.061 149.3,84.359 150.178,85.237 150.178,86.15 ; v1(149.3,86.15) 150.178,86.15 ; M101s.1@152.775,73.125 M101s.1@152.786,73.136 ; M101s.1@152.775,73.354 v1(152.775,73.975) ; v1(166.142,164.38) 166.138,164.384 166.138,168.125 ; 221.2,168 219.825,169.375 166.44,169.375 166.142,169.077 166.142,168.125 166.138,168.125 ; 134.8,135.9 139.911,135.9 140.376,135.434 143.689,135.434 144.552,134.571 144.552,131.259 151.194,131.259 152.306,130.147 152.306,126.694 152.6,126.4 152.6,86.725 152.025,86.15 150.178,86.15 ; 134.8,168.125 166.138,168.125
  Bottom Layer w0.508: v1(27.865,76.475) M35.2@27.865,77.719 ; v1(48.9,62.225) 52.297,65.622 103.853,65.622 v1(107.25,62.225) ; J2UI.A1@92.19,163.88 v1(92.19,165.715) ; RFC4.1@134.8,133.6 v1(134.8,135.05) ; v1(134.8,157.085) v1(134.8,161.9) ; v1(144.175,80.95) 149.002,80.95 149.3,81.248 v1(149.3,86.15) ; v1(148.739,73.975) v1(152.775,73.975) ; 166.142,159.416 J1UI.A2@166.142,160.206 v1(166.142,164.38)
VCC_20V: C174.1 C175.1 J1UI.A1 R32a.1 R444.2 U106.1 | length 253.6
  Top Layer w0.762: v1(156.225,33.475) 158.177,33.475 158.624,33.921 158.624,43.447 158.177,43.893 150.625,43.893 150.178,44.339 150.178,83.905 150.738,84.466 154.126,84.466 154.572,84.912 154.572,88.299 154.592,88.319 154.592,96.763 155.4,97.572 155.4,159.025 156.1,159.725 v1(168.6,159.725)
  Bottom Layer w0.762: U106.1@69.6,35.376 69.6,29.9 70.046,29.454 74.354,29.454 75.818,30.918 99.054,30.918 99.5,31.364 99.5,35.904 99.946,36.35 124.114,36.35 126.989,33.475 v1(156.225,33.475) ; 167.412,159.416 167.412,159.479 167.431,159.498 168.373,159.498 v1(168.6,159.725)
VDDA: Cp44.1 CP44E.1 RFC3.2 U3.44 | length 19.2
  Top Layer w0.305: v1@178.05,113.37 178.05,117.371 v1(178.257,117.58) v1(178.257,117.58)
  Bottom Layer w0.305: RFC3.2@170.343,113.029 170.376,112.997 CP44E.1@173.191,112.997 ; CP44E.1@173.191,113.018 Cp44.1@176.27,113.018 ; Cp44.1@176.2,112.997 177.7,112.997 v1@177.98,113.277 ; v1(178.257,117.58) 178.257,122.42 178.849,123.012 U3.44@178.849,124.414
  other v1: 178.042,113.37
VREF+: CP43.2 CP43E.1 M41.1 U3.43 | length 198
  Top Layer w0.152: v1(75.325,72.55) 90.12,72.55 95.778,78.208 95.778,80.728 95.425,81.081 95.425,102.851 96.644,104.07 109.818,104.07 110.136,103.752 123.611,103.752 123.7,103.841 123.7,107.355 v1(123.653,107.402)
  Bottom Layer w0.152: M41.1@42.5,62.225 46.454,62.225 51.526,67.297 74.86,67.297 75.725,68.162 75.725,72.15 v1(75.325,72.55) ; v1(123.653,107.402) 123.697,107.358 124.186,107.358 124.462,107.082 138.647,107.082 142.874,111.308 145.834,111.308 145.923,111.398 145.923,113.45 146.567,114.094 146.567,115.65 ; CP43E.1@141.572,116.616 143.816,116.616 144.783,115.65 146.567,115.65 ; U3.43@179.349,124.414 179.349,122.889 178.721,122.26 178.721,119.66 179.034,119.347 179.034,118.139 ; CP43.2@180.209,118.152 179.047,118.152 179.034,118.139 ; 146.567,115.65 146.567,117.206 146.656,117.295 148.648,117.295 149.283,116.66 176.684,116.66 176.7,116.675 178.8,116.675 179.034,116.909 179.034,118.139
pads on no net: J1UI.A7 J1UI.MH1 J1UI.MH2 J3UI.A9 J3UI.A16 J3UI.MH1 J3UI.MH2 J4.1 J4.3 J4.5 J4.MP1 J4.MP2 J5.2 J5.MP1 J5.MP2 J20.A1 J20.A2 J20.A3 J20.A4 J20.A5 J20.A8 J20.A9 J20.A10 J20.B4 J20.B5 J20.B8 J20.B9 J20.B12 J20.MH1 J20.MH2 J100.11 J100.12 J100.13 J100.14 J100.NPTH1 J100.NPTH2 S0.1 S0.2 S1.1 S2.1 S3.1 S4.1 S5.1 S6.1 S6.2 S7.1 S8.1 S9.1 S10.1 S11.1 S12.1 S12.2 S13.1 S14.1 S15.1 S16.1 S17.1 S18.1 S18.2 S19.1 S20.1 S21.1 S22.1 S44.2 S44.3 S44.NPTH1 S77.1 S77.4 S77.NPTH1 TS1.c TS1.NPTH1 TS1.NPTH2 U1.7 U2.40 U2.47 U2.48 U3.19 U4.3 U10.1 U12.3 U14a.3 U15.7 U15.11 U15.12 U19.14 U19.30 U19.57 U19.69 U19.70 U19.73 U342.4 U342.5 U342.9 U342.10 Y1.2 Y1.3

## Polygon pours and split planes (outlines as drawn)
GND on Top Layer "top" (solid, remove dead copper, shelved, pour order 6): 25.375,171.399 25.4,25.4 225.4,25.4 225.4,171.399
GND on Bottom Layer "bottom" (solid, remove dead copper, shelved, pour order 4): 25.375,171.399 25.527,171.399 225.4,171.399 225.476,25.4 25.4,25.4

## Keep-outs
Top Layer:
  lines w0.127: 200.289,40.82 200.289,63.827 182.472,63.827 182.472,40.806 200.299,40.806 ; 34.607,87.009 34.607,155.918 71.303,155.918 71.332,87.009 34.607,87.009
Bottom Layer:
  lines w0.127: 34.615,86.996 34.615,155.918 71.303,155.918 71.332,86.996 34.615,86.996 ; 182.498,40.818 200.279,40.818 200.279,63.829 182.498,63.829 182.498,40.818
Keep-Out Layer:
  lines w0.127: 34.617,87 71.259,87 ; 34.617,87.009 34.617,155.918 71.305,155.918 71.304,87 ; 203.199,26.451 ccw(c202.9,27.396) 203.89,27.35 ; 203.199,26.451 26.612,26.451 cw(c26.608,27.659) 25.4,27.659 25.387,169.226 cw(c26.383,169.234) 26.375,170.23 224.239,170.23 ; 203.9,27.35 203.9,74.096 ; 203.9,74.118 cw(c204.979,74.096) 205,75.175 ; 204.979,75.175 224.15,75.175 ; 224.182,75.175 ccw(c224.15,76.483) 225.458,76.516 ; 224.234,170.242 cw(c224.239,168.999) 225.481,169.009 ; 225.458,76.483 225.476,168.989 ; 28.652,35.754 28.652,40.263 29.453,40.263 29.453,35.754 28.652,35.754 ; 28.652,41.736 28.652,47.119 29.453,47.119 29.453,41.736 28.652,41.736 ; 30.06,35.779 30.06,36.58 35.674,36.58 35.674,35.779 30.06,35.779 ; 30.644,48.625 30.644,49.447 35.822,49.447 35.822,48.625 30.644,48.625 ; 36.316,35.765 36.316,41.212 37.118,41.212 37.118,35.765 36.316,35.765 ; 36.316,42.045 36.316,47.35 37.118,47.35 37.118,42.045 36.316,42.045 ; 71.304,122.494 71.305,122.494 ; 83.888,88.34 83.888,154.557 94.074,154.557 94.074,88.34 83.888,88.34 ; 182.498,40.833 182.498,63.795 200.258,63.795 200.258,63.787 200.258,40.833 182.498,40.833

## Silkscreen, mask and mechanical layers (free items; w line width, h text height)
Top Overlay:
  circle w0.8: c40.95,164.3 r1.486
  circle w0.8: c223.45,164.3 r1.486
  circle w0.8: c192.898,31.085 r1.486
  circle w0.8: c125.9,30.975 r1.486
  circle w0.8: c27.4,30.775 r1.486
  circle w0.8: c149.21,89.45 r1.486
  circle w0.8: c75.206,89.45 r1.486
  circle w0.8: c149.21,164.45 r1.486
  circle w0.8: c75.206,164.45 r1.486
  lines w0.254: 73.075,89.475 ccw(c75.112,89.462) 75.1,87.425 149.375,87.425 ccw(c149.363,89.487) 151.425,89.5 151.425,164.475 ccw(c149.263,164.438) 149.225,166.6 75.375,166.6 ccw(c75.138,164.537) 73.075,164.775 73.075,89.475
  lines w0.381: 28.373,73.013 cw(c30.75,73.013) 30.75,75.39 ; 28.375,33.225 28.375,73.05 ; 28.4,33.225 ccw(c31.1,33.1) 31.1,30.397 ; 30.75,75.4 155.862,75.4 ; 31.1,30.4 155.544,30.4 ; 91.77,88.13 92.067,87.833 214.058,87.833 ; 91.77,154.775 91.986,154.991 215.38,154.991 ; 155.544,30.393 ccw(c155.544,33.266) 158.417,33.266 ; 155.85,75.393 cw(c155.862,72.836) 158.411,72.622 ; 158.417,33.2 158.417,44.025 ; 158.417,60.25 158.417,72.625 ; 214.075,87.825 ccw(c214.026,91.451) 217.653,91.5 ; 215.425,154.991 cw(c215.38,152.745) 217.625,152.7 ; 217.653,91.428 217.653,152.745
  lines w0.508: 206.861,155.515 217.556,155.515 217.556,168.4 206.861,168.4 206.861,155.515
  lines w1: 26.325,169.425 224.282,169.5 ; 27.1,27.2 202.7,27.25
  lines w1.27: 170.469,60.654 cw(c191.4,52.4) 202.913,71.731 ; 170.687,43.638 ccw(c191.4,52.425) 203.029,33.163
  text "CPU debug" at 208.175,166.925 h0.81
  text "options" at 208.925,165.725 h0.81
  text "SWDIO" at 207.449,164.062 h0.81
  text "TX" at 207.608,162.119 h0.81
  text "NRST" at 207.696,160.044 h0.81
  text "BOOT0" at 207.546,158.162 h0.81
  text "SWCLK" at 207.511,156.29 h0.81
  text "1(160m)" at 63.983,71.73 h0.81
  text "LORA ANTENNA" at 152.644,43.806 h2.03 r90
Bottom Overlay:
  lines w0.254: 73.625,164.55 73.625,89.625 ccw(c75.275,89.45) 75.1,87.8 99.396,87.8 ; 73.625,164.591 cw(c75.197,164.578) 75.21,166.15 149.425,166.15 ; 147.234,87.78 149.578,87.78 ; 149.43,166.139 cw(c149.287,164.487) 150.94,164.344 ; 149.521,87.78 ccw(c149.417,89.31) 150.947,89.414 ; 150.935,89.159 150.935,164.747
  lines w0.508: 76.815,54.799 76.815,49.915 116.634,49.915 116.634,54.783 116.606,54.81 ; 76.802,54.803 76.802,64.607 116.63,64.607 116.63,54.803 76.802,54.803
  lines w1: 26.375,169.375 224.231,169.5 ; 26.975,27.3 203,27.3
  text "ToDo: Wire USB-C connector properly(5V, resistors, etc)" at 152.7,187.8 h0.81
  text "ToDo: Add paddle connector" at 152.575,185.95 h0.81
  text "ToDo: Need fuse on 5V USB ?" at 152.55,184.275 h0.81
  text "ToDo: Adjust side buttons position" at 153.025,182.575 h0.81
  text "ToDo: Adjust LCD connectors" at 152.975,180.875 h0.81
  text "ToDo: All cutouts are not right mechanically, adjust !!" at 152.95,179.075 h0.81
  text "ToDo: Review width of power traces" at 152.975,177.525 h0.81
  text "mcHF QRP Transceiver" at 103.982,62.499 h0.81
  text "== Paddle Connection ==" at 202.225,61.3 h0.81 r90
  text "UI board, rev 0.8.4, Krassi Atanassov, M0NKA" at 114.801,60.825 h0.81
  text "www.m0nka.co.uk" at 89.065,58.801 h0.81
  text "27 Apr 2024" at 114.73,58.686 h0.81
  text "For ham radio experimentaion, non-commercial use" at 115.551,56.2 h0.81
  text "SN" at 114.905,51.35 h1.83
Mechanical 1:
  circle w0.254: c191.377,52.391 r3.7
  lines w0.127: 28.397,37.614 158.318,37.614 ; 28.423,68.199 158.394,68.199 ; 28.448,58.01 158.369,58.01 ; 28.451,47.799 158.394,47.799 ; 48.14,30.425 48.14,75.387 ; 66.44,30.425 66.44,75.387 ; 84.74,30.429 84.74,75.375 ; 103.041,30.451 103.041,75.387 ; 121.34,30.451 121.34,75.387 ; 139.64,30.476 139.64,75.387 ; 25.4,26.451 225.449,26.451 225.449,170.25 25.4,170.25 25.4,26.451
  lines w0.152: 200.46,40.826 182.329,40.826 182.329,63.973 200.467,63.973 ; 200.469,40.826 200.469,63.973
  lines w0.254: 25.575,98.3 225.499,98.3 ; 182.329,40.826 182.329,45.833 ; 187.739,52.391 195.077,52.391 ; 191.403,43.409 191.403,61.409 ; 200.469,58.967 200.469,63.973
Mechanical 4:
  lines w0.254: 27.4,30.801 192.898,31.085 ; 40.95,164.3 223.45,164.3
Mechanical 13:
  lines w0.152: 6.85,170.225 228.6,170.225 ; 8.975,26.45 230.725,26.45

## Dimensions
223.45,164.3 to 40.95,164.3 on Mechanical 4
223.45,164.3 to 225.449,170.25 on Mechanical 4
225.499,98.3 to 223.45,164.3 on Mechanical 4
225.275,92.8 to 225.499,98.3 on Mechanical 4
225.499,98.3 to 225.45,116.3 on Mechanical 4
225.499,98.3 to 226.005,137.303 on Mechanical 4
225.499,98.3 to 225.216,153.795 on Mechanical 4
27.4,30.775 to 25.4,27.659 on Mechanical 4
125.9,30.975 to 27.4,30.775 on Mechanical 4
192.898,31.085 to 125.9,30.975 on Mechanical 4
27.4,30.801 to 25.575,98.3 on Mechanical 4
43.395,157.8 to 25.4,170.25 on Mechanical 1
43.395,157.8 to 25.575,98.3 on Mechanical 1
151.802,152.656 to 225.499,98.3 on Mechanical 1
149.21,89.45 to 149.21,164.45 on Mechanical 1
75.206,164.45 to 149.21,164.45 on Mechanical 1
75.206,164.45 to 78.71,158.8 on Mechanical 1
75.206,164.45 to 78.71,165.15 on Mechanical 1
73.625,164.55 to 25.4,170.25 on Mechanical 1
187.677,52.391 to 203.875,53.675 on Mechanical 1
195.077,52.391 to 225.449,26.451 on Mechanical 1
26.612,26.451 to 25.575,98.3 on Mechanical 1
61.075,156.075 to 62.125,86.9 on Mechanical 1
71.225,137.225 to 34.525,136.175 on Mechanical 1
83.914,139.47 to 94.074,139.292 on Mechanical 1
87.952,154.405 to 88.105,88.34 on Mechanical 1
225.75,25.2 to 230.725,26.45 on Mechanical 12
214.097,154.432 to 224.234,170.242 on Mechanical 1
211.277,154.305 to 211.43,88.24 on Mechanical 1
207.239,139.37 to 217.399,139.192 on Mechanical 1
200.469,40.826 to 225.458,76.483 on Mechanical 1
182.329,40.826 to 225.449,26.451 on Mechanical 1
182.329,40.826 to 200.469,40.826 on Mechanical 1
182.329,63.973 to 200.46,40.826 on Mechanical 1
25.4,26.451 to 225.449,26.451 on Mechanical 1
224.239,170.242 to 203.199,26.451 on Mechanical 1
28.41,75.4 to 28.423,68.199 on Mechanical 1
28.423,68.199 to 28.448,58.01 on Mechanical 1
28.448,58.01 to 28.451,47.799 on Mechanical 1
28.451,47.799 to 28.397,37.614 on Mechanical 1
28.397,37.614 to 28.4,30.4 on Mechanical 1
48.14,30.425 to 28.4,30.4 on Mechanical 1
48.14,30.425 to 66.44,30.425 on Mechanical 1
66.44,30.425 to 84.74,30.429 on Mechanical 1
84.74,30.429 to 103.041,30.451 on Mechanical 1
103.041,30.451 to 121.34,30.451 on Mechanical 1
121.34,30.451 to 139.64,30.476 on Mechanical 1
139.64,30.476 to 158.394,30.4 on Mechanical 1
44.9,84.585 to 26.612,26.451 on Mechanical 1

## Text inside footprints (layer, text, board x,y; h text height)
J100: Bottom Overlay "1" at 209.5,120.45 h1.5 r180; Mechanical 7 "EDGE" at 225.525,123.875 h1 r270; Mechanical 7 "PCB" at 225.525,106.3 h1 r270; Mechanical 4 "1" at 211,119.3 h1.5 r180; Mechanical 4 "9" at 210.95,110.475 h1.5 r180; Mechanical 4 "10" at 219.375,110.15 h1.5 r180
TS1: Mechanical 7 "PCB" at 224.692,87.212 h1 r270; Mechanical 7 "EDGE" at 224.692,96.737 h1 r270
U3: Bottom Overlay "STM32H7" at 197.555,138.638 h3.05
U19: Bottom Overlay "SDRAM" at 170.512,72.671 h1.52
U106: Bottom Overlay "v 0.2" at 72.729,35.27 h1.52 r270